# Altium PCB iForce-FPC-V0.1.PcbDoc (part 1 of 2)
Units mil, origin at the board's own origin, x right, y up, seen from the top; angles counter-clockwise.
Board outline 803.81 x 551.18 mil, 2 copper layers (Top Layer, Bottom Layer); 1 components, 2 nets, 4 pads, 4 vias.
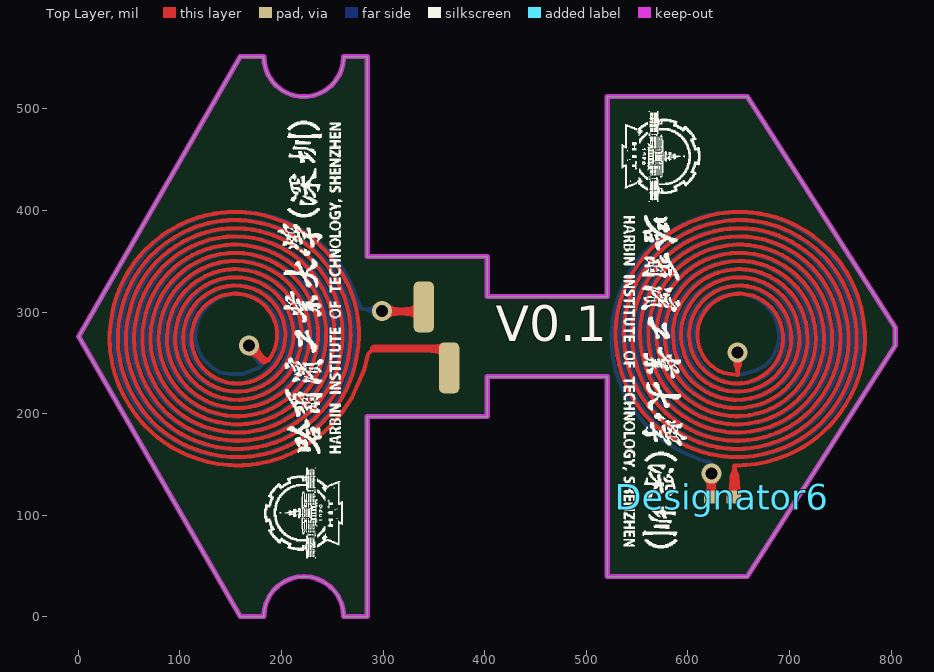
[diagram p0: Top Layer view]
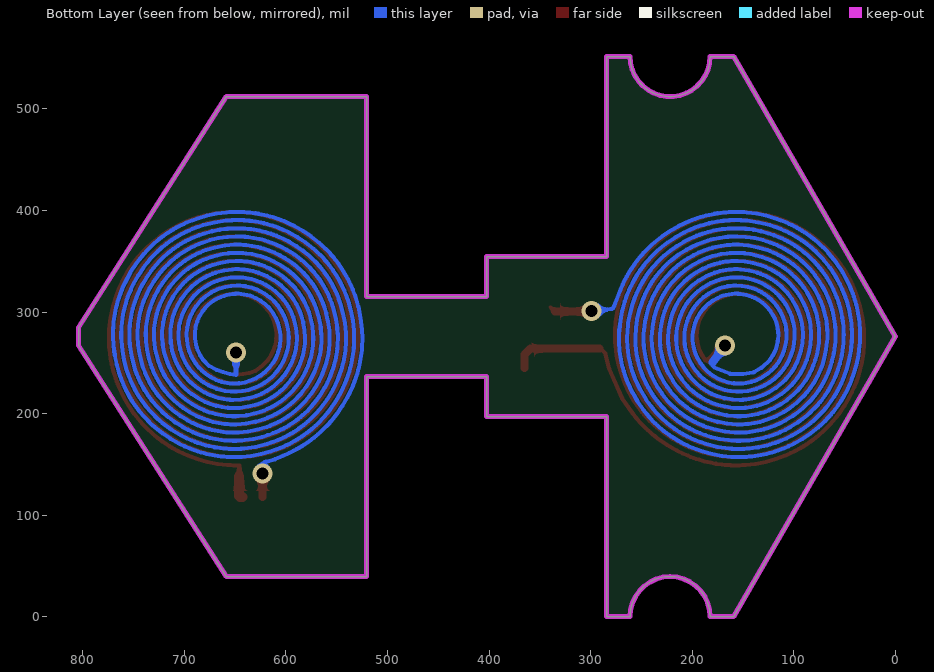
[diagram p1: Bottom Layer view, seen from below]

## Layer stack, top to bottom
Top Solder: solder mask 0.4, Solder Resist, Dk 3.5
Top Layer: signal copper 1.4
Dielectric 1: dielectric 12.6, FR-4, Dk 4.8
Bottom Layer: signal copper 1.4
Bottom Solder: solder mask 0.4, Solder Resist, Dk 3.5

## Board outline
159.36,0.25 182.5,0.25 cw(c221.87,0.25) 261.24,0.25 284.38,0.25 284.38,197.1 402.49,197.1 402.49,236.47 520.6,236.47 520.6,39.62 658.55,39.62 804.06,266.99 804.06,284.69 658.55,512.06 520.6,512.06 520.6,315.21 402.49,315.21 402.49,354.58 284.38,354.58 284.38,551.43 261.24,551.43 cw(c221.87,551.43) 182.5,551.43 159.36,551.43 0.25,275.84

## Design rules (kind name [scope] priority, off if disabled: settings)
Clearance [All] p1: gap=4 ignorepadtopadclearanceinfootprint=FALSE
PolygonConnect [All] p1: connectstyle=Relief reliefconductorwidth=10 reliefentries=4 polygonreliefangle="90 Angle" airgapwidth=10
RoutingVias [All] p1: holewidth=11.81 width=19.68 viastyle="Through Hole" minholewidth=11.81 minwidth=19.68 maxholewidth=11.81 maxwidth=19.68
SolderMaskExpansion [All] p1: expansion=4 istentingtop=FALSE
Width [All] p1: maxlimit=10 minlimit=3 preferedwidth=3
30 further rules are at their usual default settings.

## Components (designator, comment, footprint, x,y, rotation, side; value= is the part's Value field where it differs from the comment)
Designator6 "Comment" CAPC0603X33X15LL03T05 634,118 r0 top

## Footprints (in the part's own frame and the unit in brackets; to place one, negate y for a bottom-side part, rotate by r counter-clockwise, add the part's x,y. Pads: shape width x height; smd on the part's side, far side on the other; paste and mask are expansions set on the pad)
CAPC0603X33X15LL03T05 [mm] "Chip Capacitor, 2-Leads, Body 0.60x0.30mm, IPC High Density"
  rect 0.36x0.32 smd: 1(-0.28,0) 2(0.28,0)
  body extent -0.32,-0.17 0.32,0.17, height 0.33

## Free pads (board coordinates)
  rrect50% 20x50 smd: 1(340,305) 1(365,245)

## Via types
v1: diameter 19.68, hole 11.81, Top Layer to Bottom Layer, tented both sides, 4 vias

## Nets (pads, with @x,y where several pads share a name; then routed paths per layer and width w, separated by ;. In a path a pad name is that pad's centre, name@x,y a point inside that pad or via, vN(x,y) a via of type N, cw(c..) or ccw(c..) an arc to the next point about the centre after c; other vN are vias at no path point)
L1: Designator6.1 Designator6.2 | length 11479.9
  Top Layer w4: 617.73,252.54 cw(c648.33,276.38) 612.13,262.45 cw(c651.15,277.59) 610.41,267.99 cw(c651.11,277.6) 609.47,273.73 cw(c649.51,277.46) 609.35,279.54 cw(c648.2,277.46) 611.67,290.84 cw(c650.3,276.77) 614.02,296.12 cw(c650.75,276.54) 620.8,305.45 cw(c649.71,277.53) 625.1,309.3 cw(c649.85,277.29) 629.9,312.49 cw(c650.69,275.81) 635.11,314.99 cw(c651.05,274.93) 640.61,316.76 cw(c651.05,274.96) 646.3,317.78 cw(c650.95,275.98) 652.07,318.02 cw(c650.99,277.61) 657.81,317.46 cw(c650.76,276.37) 663.41,316.09 cw(c650.27,274.83) 668.79,313.98 cw(c650.1,274.38) 682.62,303.7 cw(c651.24,275.59) 689.06,294.15 cw(c649.13,274.48) 691.27,288.82 cw(c648.57,274.27) 693.56,277.5 cw(c649.97,274.38) 693.6,271.73 cw(c650.55,274.41) 691.36,260.44 cw(c648.26,275.12) 689.15,255.1 cw(c647.68,275.39) 682.82,245.45 cw(c648.7,274.53) 678.8,241.3 cw(c649.34,273.9) 669.32,234.77 cw(c648.17,276.04) 664.03,232.46 cw(c647.93,276.59) 647.01,229.63 cw(c647.94,274.1) 641.26,230.12 cw(c648.1,274.91) 635.62,231.35 cw(c648.57,276.57) 630.18,233.28 cw(c648.98,277.55) 625,235.86 cw(c648.91,277.47) 615.76,242.77 cw(c647.62,276.1) 611.84,247.01 cw(c647.19,275.71) 608.5,251.71 cw(c648.78,276.7) 605.76,256.79 cw(c650.02,277.28) 603.65,262.17 cw(c650.48,277.44) 601.38,273.49 cw(c649.13,277.32) 601.27,279.27 cw(c647.47,277.39) 601.86,285 cw(c648.65,277.17) 603.16,290.62 cw(c650.26,276.7) 605.12,296.06 cw(c651.22,276.29) 607.7,301.23 cw(c651.17,276.35) 614.55,310.52 cw(c649.85,277.56) 618.74,314.5 cw(c649.12,278.39) 623.37,317.94 cw(c650.13,276.85) 628.38,320.8 cw(c650.8,275.5) 633.7,323.06 cw(c651.04,274.92) 650.7,326.09 cw(c650.97,277.22) 656.46,325.78 cw(c650.98,277.6) 662.14,324.79 cw(c650.55,275.77) 667.68,323.14 cw(c650.08,274.46) 672.99,320.87 cw(c649.95,274.11) 687.01,310.78 cw(c651.66,275.87) 690.82,306.44 cw(c651.69,275.95) 694.09,301.69 cw(c650.11,274.99) 696.81,296.6 cw(c648.87,274.41) 698.95,291.23 cw(c648.55,274.27) 701.72,274.18 cw(c650.98,274.31) 701.38,268.42 cw(c651.29,274.31) 700.38,262.74 cw(c649.46,274.74) 698.75,257.2 cw(c648.11,275.22) 696.52,251.87 cw(c647.62,275.43) 686.63,237.69 cw(c649.25,273.91) 682.39,233.77 cw(c649.9,273.16) 677.74,230.36 cw(c648.88,274.73) 672.74,227.48 cw(c648.17,276.11) 667.45,225.15 cw(c647.84,276.98) 650.53,221.63 cw(c647.96,275.14) 644.76,221.67 cw(c647.92,274) 633.4,223.62 cw(c648.58,276.48) 627.94,225.5 cw(c649.01,277.57) 622.7,227.94 cw(c649.17,277.87) 613.1,234.37 cw(c648.36,276.89) 608.85,238.29 cw(c647.18,275.74) 605.05,242.62 cw(c646.98,275.54) 601.74,247.35 cw(c648.58,276.54) 598.94,252.4 cw(c649.9,277.19) 596.68,257.72 cw(c650.66,277.48) 593.25,274.66 cw(c648.78,277.36) 593.27,280.44 cw(c647.05,277.46) 593.89,286.17 cw(c648.21,277.24) 595.13,291.81 cw(c649.91,276.78) 596.94,297.29 cw(c651.09,276.33) 599.29,302.57 cw(c651.38,276.21) 609.3,316.68 cw(c649.72,277.75) 613.51,320.62 cw(c649.32,278.14) 623.04,327.09 cw(c650.59,275.88) 628.26,329.58 cw(c651.03,274.84) 633.7,331.53 cw(c651.07,274.82) 650.79,334.13 cw(c651.01,277.27) 656.56,333.86 cw(c651.1,278.34) 662.26,333 cw(c650.72,276.5) 667.85,331.57 cw(c650.24,274.95) 673.28,329.58 cw(c649.82,273.95) 678.49,327.08 cw(c649.7,273.7) 688.1,320.65 cw(c650.47,274.66) 692.38,316.78 cw(c651.59,275.77) 696.27,312.51 cw(c652.44,276.5) 699.7,307.88 cw(c650.89,275.46) 702.65,302.92 cw(c649.44,274.69) 705.11,297.69 cw(c648.41,274.26) 707.06,292.25 cw(c648.35,274.21) 709.76,275.16 cw(c650.7,274.29) 709.57,269.39 cw(c651.42,274.28) 707.47,258.06 cw(c648.88,274.97) 705.61,252.59 cw(c647.74,275.41) 703.24,247.32 cw(c647.39,275.56) 693.37,233.11 cw(c648.94,274.19) 689.26,229.06 cw(c650.13,272.85) 684.77,225.43 cw(c649.59,273.62) 679.95,222.26 cw(c648.66,275.19) 674.85,219.56 cw(c648.06,276.46) 669.51,217.34 cw(c647.84,276.98) 646.82,213.53 cw(c647.88,273.98) 641.06,213.91 cw(c647.83,273.31) 635.37,214.84 cw(c648.23,275.19) 629.79,216.3 cw(c648.71,276.73) 624.36,218.28 cw(c649.13,277.76) 619.12,220.74 cw(c649.18,277.91) 605.02,230.77 cw(c647.72,276.29) 601,234.91 cw(c646.38,275.1) 597.39,239.41 cw(c647.18,275.66) 594.21,244.23 cw(c648.75,276.6) 591.49,249.32 cw(c650.04,277.22) 589.24,254.64 cw(c650.74,277.5) 585.13,277.29 cw(c647.97,277.41) 585.39,283.06 cw(c647.33,277.42) 587.49,294.39 cw(c649.91,276.74) 589.31,299.87 cw(c651.12,276.28) 591.6,305.18 cw(c651.73,276) 601.12,319.64 cw(c650.45,277.07) 605.08,323.85 cw(c649.29,278.27) 609.4,327.67 cw(c648.65,279.04) 614.05,331.08 cw(c649.7,277.45) 619,334.06 cw(c650.51,275.97) 624.19,336.59 cw(c651,274.85) 629.59,338.66 cw(c651.18,274.34) 646.57,342.03 cw(c651.03,276.1) 652.34,342.17 cw(c651.07,277.79) 658.1,341.8 cw(c651.15,278.69) 663.8,340.91 cw(c650.77,276.81) 669.4,339.51 cw(c650.29,275.2) 674.86,337.62 cw(c649.84,274.05) 680.15,335.28 cw(c649.59,273.53) 694.58,325.71 cw(c650.68,274.83) 698.79,321.76 cw(c651.87,275.98) 702.63,317.45 cw(c652.1,276.24) 709.1,307.91 cw(c649.78,274.9) 711.69,302.75 cw(c648.59,274.36) 713.84,297.38 cw(c648.1,274.16) 717.82,274.69 cw(c650.88,274.25) 717.61,268.92 cw(c652.03,274.19) 715.68,257.56 cw(c649.44,274.82) 713.99,252.04 cw(c648.09,275.3) 711.84,246.67 cw(c647.18,275.7) 699.12,227.46 cw(c648.92,274.15) 695.01,223.41 cw(c650.13,272.82) 690.57,219.71 cw(c650.1,272.91) 685.84,216.42 cw(c649.07,274.52) 680.83,213.54 cw(c648.33,275.95) 675.6,211.09 cw(c647.88,277.01) 670.19,209.06 cw(c647.72,277.47) 653.2,205.68 cw(c647.87,275.77) 647.43,205.48 cw(c647.86,274.15) 641.66,205.75 cw(c647.82,273.3) 630.31,207.77 cw(c648.48,275.93) 624.8,209.49 cw(c648.95,277.27) 619.44,211.64 cw(c649.37,278.2) 600.17,224.3 cw(c647.9,276.52) 596.07,228.36 cw(c646.61,275.33) 592.33,232.75 cw(c646.17,274.95) 588.96,237.44 cw(c647.79,276.01) 586,242.39 cw(c649.27,276.82) 583.44,247.57 cw(c650.44,277.34) 581.3,252.94 cw(c651.01,277.56) 577.11,275.6 cw(c648.45,277.43) 577.2,281.38 cw(c646.63,277.54) 577.75,287.12 cw(c646.85,277.48) 578.78,292.8 cw(c648.72,277.06) 580.28,298.37 cw(c650.27,276.58) 582.21,303.82 cw(c651.38,276.14) 584.57,309.1 cw(c651.75,275.99) 597.82,327.96 cw(c649.76,277.81) 601.99,331.95 cw(c648.54,279.19) 606.47,335.58 cw(c648.82,278.77) 611.23,338.84 cw(c649.83,277.16) 616.24,341.71 cw(c650.58,275.74) 621.46,344.17 cw(c651.04,274.65) 626.87,346.23 cw(c651.19,274.29) 649.57,350.22 cw(c651.07,276.97) 655.35,350.11 cw(c651.18,278.79) 661.09,349.54 cw(c651.12,278.55) 666.76,348.51 cw(c650.7,276.68) 672.34,347.03 cw(c650.22,275.11) 677.8,345.12 cw(c649.77,273.96) 683.09,342.8 cw(c649.54,273.44) 702.11,329.76 cw(c651.19,275.3) 706.17,325.66 cw(c652.51,276.5) 709.9,321.25 cw(c652.92,276.85) 713.26,316.56 cw(c651.29,275.78) 716.24,311.62 cw(c649.79,274.95) 718.84,306.46 cw(c648.58,274.39) 721.04,301.12 cw(c647.7,274.06) 725.74,278.54 cw(c649.82,274.23) 725.85,272.77 cw(c651.5,274.19) 725.52,267 cw(c652.29,274.15) 723.5,255.65 cw(c649.63,274.8) 721.84,250.12 cw(c648.22,275.28) 719.77,244.73 cw(c647.25,275.69) 717.31,239.49 cw(c646.88,275.88) 707.72,225.06 cw(c648.11,274.88) 703.85,220.77 cw(c649.2,273.81) 699.68,216.78 cw(c650.42,272.43) 695.21,213.13 cw(c650.32,272.6) 690.48,209.83 cw(c649.28,274.23) 685.5,206.91 cw(c648.49,275.69) 680.31,204.36 cw(c647.97,276.87) 674.95,202.2 cw(c647.67,277.66) 652.36,197.56 cw(c647.84,275.53) 646.58,197.44 cw(c647.81,273.86) 640.82,197.75 cw(c647.74,272.78) 629.45,199.68 cw(c648.37,275.44) 623.91,201.29 cw(c648.85,276.9) 618.49,203.29 cw(c649.28,277.95) 613.23,205.69 cw(c649.44,278.33) 594.26,218.81 cw(c647.79,276.46) 590.17,222.89 cw(c646.5,275.27) 586.4,227.26 cw(c646.37,275.1) 579.91,236.79 cw(c648.73,276.51) 577.21,241.89 cw(c650.05,277.14) 574.88,247.18 cw(c651.29,277.63) 571.36,258.2 cw(c651.28,277.65) 569.42,269.6 cw(c649.95,277.51) 569.07,275.37 cw(c648.48,277.47) 569.12,281.14 cw(c646.69,277.55) 569.6,286.89 cw(c645.94,277.63) 570.51,292.59 cw(c647.85,277.25) 571.84,298.2 cw(c649.55,276.78) 573.58,303.71 cw(c650.9,276.31) 575.7,309.09 cw(c652.07,275.78) 581.04,319.34 cw(c652.03,275.83) 587.76,328.76 cw(c650.98,276.69) 591.59,333.09 cw(c649.92,277.7) 595.71,337.13 cw(c648.71,279.02) 600.11,340.86 cw(c648.18,279.67) 604.78,344.25 cw(c649.27,278.05) 609.68,347.3 cw(c650.15,276.52) 614.79,349.98 cw(c650.78,275.21) 620.09,352.31 cw(c651.26,273.97) 631.1,355.84 cw(c651.29,273.93) 642.49,357.83 cw(c651.15,275.21) 648.26,358.23 cw(c651.1,276.63) 654.03,358.23 cw(c651.17,278.38) 659.79,357.81 cw(c651.17,278.83) 671.13,355.73 cw(c650.51,276.13) 676.67,354.09 cw(c650.03,274.69) 682.08,352.06 cw(c649.6,273.66) 687.34,349.67 cw(c649.39,273.2) 706.44,336.71 cw(c650.89,274.94) 710.59,332.7 cw(c652.09,276.1) 714.46,328.42 cw(c653.17,277.02) 721.21,319.07 cw(c650.9,275.58) 724.07,314.06 cw(c649.46,274.83) 726.59,308.85 cw(c648.31,274.31) 728.74,303.49 cw(c647.66,274.06) 733.91,275.16 cw(c650.8,274.19) 733.78,269.39 cw(c652.62,274.08) 733.24,263.65 cw(c653.04,274.05) 732.29,257.96 cw(c651.11,274.44) 730.95,252.34 cw(c649.42,274.91) 729.22,246.83 cw(c648.06,275.38) 727.12,241.45 cw(c646.82,275.92) 721.86,231.15 cw(c646.7,275.98) 715.3,221.63 cw(c647.62,275.25) 711.56,217.22 cw(c648.62,274.35) 707.53,213.08 cw(c649.79,273.13) 703.23,209.22 cw(c650.71,272.05) 693.89,202.47 cw(c649.27,274.32) 688.88,199.59 cw(c648.5,275.77) 683.69,197.06 cw(c647.97,276.95) 678.34,194.87 cw(c647.65,277.77) 650.06,189.41 cw(c647.81,274.87) 644.29,189.45 cw(c647.73,273.1) 638.53,189.89 cw(c647.72,272.64) 627.19,191.95 cw(c648.38,275.35) 621.64,193.56 cw(c648.86,276.83) 616.21,195.53 cw(c649.3,277.94) 610.92,197.86 cw(c649.65,278.67) 591.56,210.44 cw(c648.45,277.21) 587.29,214.33 cw(c647.38,276.11) 583.29,218.49 cw(c646.03,274.9) 579.58,222.91 cw(c645.37,274.36) 576.18,227.57 cw(c646.99,275.46) 573.11,232.46 cw(c648.54,276.36) 570.38,237.54 cw(c649.9,277.04) 567.98,242.8 cw(c650.95,277.48) 565.92,248.21 cw(c651.61,277.71) 561.24,270.81 cw(c649.64,277.53) 560.99,276.58 cw(c648.09,277.51) 561.12,282.36 cw(c646.27,277.61) 561.64,288.1 cw(c645.51,277.69) 562.55,293.8 cw(c647.43,277.32) 563.83,299.43 cw(c649.17,276.86) 565.49,304.96 cw(c650.61,276.38) 567.51,310.37 cw(c651.67,275.95) 569.87,315.65 cw(c652.34,275.62) 582.48,334.99 cw(c650.87,276.83) 586.36,339.27 cw(c649.78,277.89) 590.51,343.28 cw(c648.57,279.22) 594.91,347.01 cw(c648.4,279.38) 604.42,353.55 cw(c649.86,276.98) 609.48,356.33 cw(c650.57,275.59) 614.71,358.79 cw(c651.05,274.48) 620.09,360.91 cw(c651.31,273.8) 648.39,366.29 cw(c651.14,276.7) 654.17,366.28 cw(c651.2,278.44) 659.93,365.89 cw(c651.28,279.54) 671.3,363.98 cw(c650.68,276.84) 676.87,362.47 cw(c650.2,275.27) 682.34,360.61 cw(c649.73,274.04) 687.68,358.4 cw(c649.24,272.96) 697.92,353.02 cw(c649.25,272.95) 707.41,346.41 cw(c649.98,273.88) 711.83,342.68 cw(c650.87,274.86) 716,338.69 cw(c652.04,276.01) 719.91,334.43 cw(c653.47,277.24) 723.53,329.94 cw(c653.32,277.15) 726.84,325.22 cw(c651.69,276.08) 729.84,320.29 cw(c650.16,275.22) 732.53,315.17 cw(c648.84,274.58) 734.89,309.9 cw(c647.48,274.03) 738.61,298.95 cw(c647.3,273.95) 741.64,281.88 cw(c649.06,274.13) 741.94,276.11 cw(c650.56,274.16) 741.88,270.34 cw(c652.33,274.08) 741.46,264.58 cw(c653.15,274.02) 739.49,253.22 cw(c650.42,274.65) 737.96,247.65 cw(c648.86,275.13) 736.09,242.18 cw(c647.63,275.59) 733.88,236.84 cw(c646.54,276.09) 728.51,226.6 cw(c646.76,275.92) 718.25,212.63 cw(c648.34,274.56) 714.29,208.43 cw(c649.47,273.42) 710.07,204.48 cw(c650.7,272.03) 705.62,200.81 cw(c651.06,271.6) 700.94,197.44 cw(c649.96,273.23) 696.05,194.37 cw(c649.04,274.79) 690.98,191.61 cw(c648.35,276.17) 685.74,189.17 cw(c647.87,277.27) 680.36,187.05 cw(c647.58,278.05) 652.09,181.43 cw(c647.77,275.39) 646.32,181.34 cw(c647.74,273.72) 640.55,181.61 cw(c647.59,271.83) 634.81,182.24 cw(c647.65,272.05) 629.13,183.24 cw(c648.04,273.97) 623.52,184.59 cw(c648.51,275.67) 618,186.29 cw(c648.99,277.08) 612.59,188.32 cw(c649.58,278.5) 602.17,193.34 cw(c649.76,278.86) 587.83,203.08 cw(c648.79,277.64) 583.46,206.87 cw(c647.84,276.62) 579.34,210.91 cw(c646.62,275.45) 575.47,215.2 cw(c645.17,274.22) 571.89,219.72 cw(c645.56,274.49) 568.59,224.45 cw(c647.2,275.55) 565.6,229.39 cw(c648.72,276.42) 562.91,234.5 cw(c650.05,277.07) 560.53,239.76 cw(c651.46,277.64) 556.71,250.68 cw(c651.84,277.78) 553.44,267.71 cw(c650.31,277.6) 553.03,273.47 cw(c648.93,277.54) 552.96,279.25 cw(c647.25,277.58) 553.23,285.02 cw(c645.36,277.73) 553.87,290.75 cw(c645.56,277.68) 554.86,296.43 cw(c647.47,277.28) 556.2,302.05 cw(c649.19,276.82) 557.88,307.57 cw(c650.62,276.34) 559.89,312.99 cw(c652.09,275.73) 564.84,323.45 cw(c652.35,275.63) 578.18,342.29 cw(c650.49,277.24) 582.17,346.47 cw(c649.35,278.4) 586.4,350.4 cw(c648.12,279.8) 590.86,354.06 cw(c647.73,280.28) 595.53,357.44 cw(c648.83,278.65) 600.41,360.53 cw(c649.76,277.08) 605.46,363.32 cw(c650.49,275.67) 610.68,365.81 cw(c651,274.52) 616.03,367.99 cw(c651.34,273.66) 649.98,374.37 cw(c651.18,277.19) 655.75,374.27 cw(c651.26,278.98) 661.51,373.82 cw(c651.33,279.88) 672.87,371.88 cw(c650.72,277.14) 678.45,370.4 cw(c650.25,275.53) 683.94,368.6 cw(c649.77,274.22) 689.32,366.47 cw(c649.22,272.95) 699.67,361.32 cw(c649.13,272.76) 713.95,351.48 cw(c650.16,274.03) 718.3,347.67 cw(c651.11,275.06) 722.42,343.63 cw(c652.33,276.23) 726.3,339.35 cw(c653.77,277.46) 729.91,334.85 cw(c653.72,277.45) 733.24,330.14 cw(c652.08,276.36) 736.28,325.24 cw(c650.53,275.46) 739.04,320.16 cw(c649.15,274.76) 741.49,314.93 cw(c648.02,274.27) 743.65,309.56 cw(c647.23,273.95) 750,275.61 cw(c650.74,274.12) 749.92,269.83 cw(c652.52,274.04) 749.5,264.08 cw(c653.75,273.93) 747.63,252.69 cw(c651.04,274.52) 746.2,247.1 cw(c649.4,274.99) 744.44,241.6 cw(c648.03,275.47) 742.37,236.2 cw(c646.66,276.05) 737.34,225.79 cw(c646.48,276.11) 723.97,206.96 cw(c648.33,274.52) 720,202.76 cw(c649.47,273.38) 715.8,198.8 cw(c650.68,272.01) 711.38,195.09 cw(c650.96,271.72) 701.91,188.5 cw(c649.45,274.12) 696.91,185.63 cw(c648.67,275.59) 691.74,183.04 cw(c648.08,276.84) 686.43,180.75 cw(c647.58,278.13) 675.47,177.06 cw(c647.49,278.38) 658.43,173.84 cw(c647.67,276.85) 652.67,173.4 cw(c647.73,275.5) 646.89,173.28 cw(c647.72,273.86) 641.12,173.5 cw(c647.59,272.01) 635.38,174.04 cw(c647.63,272) 624.04,176.14 cw(c648.28,274.77) 618.47,177.68 cw(c648.76,276.34) 613,179.53 cw(c649.23,277.61) 607.63,181.68 cw(c649.78,278.84) 597.29,186.86 cw(c649.87,279.05) 582.98,196.65 cw(c648.9,277.83) 578.59,200.42 cw(c648,276.83) 574.43,204.42 cw(c646.83,275.68) 570.49,208.65 cw(c645.43,274.46) 566.81,213.09 cw(c645.37,274.36) 560.26,222.58 cw(c647.78,275.86) 557.4,227.6 cw(c649.24,276.64) 554.82,232.76 cw(c650.49,277.22) 552.53,238.07 cw(c651.79,277.73) 548.82,249.03 cw(c652.09,277.84) 545.53,266.06 cw(c650.63,277.66) 545.05,271.82 cw(c649.33,277.59) 544.89,277.59 cw(c647.73,277.59) 545.05,283.36 cw(c645.9,277.69) 545.54,289.11 cw(c645.18,277.75) 547.51,300.48 cw(c647.95,277.13) 548.97,306.06 cw(c649.59,276.65) 550.74,311.56 cw(c650.94,276.18) 552.82,316.96 cw(c652.33,275.59) 557.82,327.38 cw(c652.62,275.47) 571.02,346.34 cw(c650.89,276.91) 574.93,350.6 cw(c649.8,277.97) 579.06,354.63 cw(c648.6,279.28) 583.41,358.42 cw(c647.39,280.75) 587.97,361.96 cw(c647.94,279.97) 592.72,365.24 cw(c648.99,278.34) 597.65,368.24 cw(c649.87,276.8) 602.74,370.96 cw(c650.56,275.44) 607.98,373.41 cw(c651.22,273.88) 618.81,377.44 cw(c651.47,273.17) 641.47,381.98 cw(c651.26,275.05) 647.24,382.35 cw(c651.21,276.45) 653.01,382.41 cw(c651.24,278.13) 658.78,382.15 cw(c651.38,280.01) 664.52,381.57 cw(c651.46,280.75) 670.22,380.67 cw(c651.1,278.81) 675.86,379.45 cw(c650.65,277.01) 681.43,377.92 cw(c650.17,275.43) 686.9,376.08 cw(c649.7,274.13) 692.28,373.96 cw(c649.14,272.83) 702.67,368.86 cw(c649.09,272.68) 721.56,355.57 cw(c650.58,274.45) 725.8,351.65 cw(c651.66,275.55) 729.83,347.51 cw(c652.96,276.75) 733.62,343.15 cw(c654.44,277.97) 737.16,338.6 cw(c653.71,277.45) 740.44,333.85 cw(c652.08,276.39) 743.45,328.93 cw(c650.53,275.5) 746.19,323.85 cw(c649.15,274.8) 748.66,318.62 cw(c647.56,274.11) 752.76,307.81 cw(c646.93,273.87) 757.93,279.43 cw(c649.73,274.08) 758.06,273.65 cw(c651.35,274.07) 757.88,267.88 cw(c653.18,273.96) 757.39,262.13 cw(c654.01,273.9) 755.45,250.76 cw(c651.23,274.5) 754.02,245.17 cw(c649.57,274.97) 752.29,239.66 cw(c648.17,275.45) 750.26,234.24 cw(c646.68,276.07) 745.39,223.76 cw(c646.09,276.35) 732.53,204.56 cw(c647.57,275.16) 728.72,200.21 cw(c648.6,274.21) 724.69,196.08 cw(c649.76,273.02) 720.44,192.16 cw(c650.98,271.62) 716,188.48 cw(c651.19,271.41) 706.53,181.89 cw(c649.66,273.84) 701.55,178.98 cw(c648.84,275.32) 696.41,176.35 cw(c648.22,276.63) 691.13,173.98 cw(c647.62,278.07) 680.25,170.07 cw(c647.44,278.6) 657.56,165.67 cw(c647.65,276.65) 651.8,165.31 cw(c647.7,275.24) 646.02,165.24 cw(c647.67,273.57) 640.25,165.49 cw(c647.54,271.7) 634.51,166.04 cw(c647.55,271.46) 623.15,168.07 cw(c648.18,274.26) 617.57,169.55 cw(c648.66,275.89) 612.07,171.31 cw(c649.13,277.26) 606.67,173.36 cw(c649.74,278.71) 596.2,178.27 cw(c650.01,279.27) 577.01,191.14 cw(c648.82,277.79) 572.65,194.94 cw(c647.88,276.77) 568.5,198.96 cw(c646.71,275.62) 564.57,203.19 cw(c645.32,274.39) 560.87,207.62 cw(c644.8,273.95) 554.22,217.04 cw(c647.2,275.49) 551.28,222.01 cw(c648.71,276.33) 548.59,227.13 cw(c650.05,276.99) 546.18,232.38 cw(c651.58,277.63) 542.16,243.22 cw(c652.12,277.84) 537,271.61 cw(c649.35,277.63) 536.84,277.38 cw(c647.76,277.62) 536.98,283.16 cw(c645.95,277.71) 537.42,288.91 cw(c644.43,277.86) 539.22,300.3 cw(c647.1,277.31) 540.57,305.92 cw(c648.82,276.85) 542.21,311.45 cw(c650.31,276.37) 544.13,316.9 cw(c651.99,275.72) 548.79,327.48 cw(c652.89,275.29) 564.82,351.48 cw(c651.03,276.84) 568.72,355.75 cw(c649.95,277.87) 572.82,359.82 cw(c648.76,279.14) 577.12,363.66 cw(c647.53,280.59) 581.62,367.27 cw(c647.29,280.88) 586.31,370.64 cw(c648.4,279.24) 591.16,373.76 cw(c649.36,277.65) 596.18,376.62 cw(c650.15,276.18) 601.33,379.23 cw(c650.76,274.91) 606.62,381.57 cw(c651.34,273.49) 617.51,385.46 cw(c651.53,272.94) 640.18,389.94 cw(c651.32,274.79) 645.95,390.35 cw(c651.25,276.15) 651.72,390.47 cw(c651.26,277.77) 657.5,390.3 cw(c651.36,279.59) 663.25,389.83 cw(c651.49,280.9) 674.63,387.99 cw(c650.93,278.18) 680.24,386.63 cw(c650.46,276.46) 685.78,384.98 cw(c649.98,274.98) 691.23,383.06 cw(c649.33,273.3) 701.81,378.41 cw(c648.87,272.34) 725.87,362.47 cw(c650.34,274.13) 730.17,358.61 cw(c651.34,275.19) 734.27,354.54 cw(c652.57,276.36) 738.15,350.26 cw(c653.99,277.59) 741.81,345.8 cw(c654.1,277.72) 748.4,336.33 cw(c651.67,276.18) 751.32,331.35 cw(c650.17,275.35) 753.99,326.23 cw(c648.84,274.69) 756.41,320.98 cw(c647.3,274.04) 760.46,310.15 cw(c646.62,273.8) 765.85,281.8 cw(c649.17,274.02) 766.09,276.02 cw(c650.69,274.05) 766.05,270.25 cw(c652.43,273.99) 765.71,264.49 cw(c654.34,273.83) 765.08,258.75 cw(c654.75,273.79) 764.15,253.06 cw(c652.8,274.16) 762.94,247.42 cw(c650.98,274.6) 761.43,241.84 cw(c649.37,275.08) 759.65,236.35 cw(c648.01,275.55) 757.61,230.94 cw(c646.53,276.16) 752.73,220.45 cw(c646.02,276.39) 736.37,196.68 cw(c648.06,274.68) 732.44,192.44 cw(c649.16,273.6) 728.31,188.41 cw(c650.36,272.31) 723.98,184.59 cw(c651.59,270.84) 719.47,180.99 cw(c651.72,270.7) 714.78,177.64 cw(c650.6,272.35) 709.92,174.52 cw(c649.64,273.94) 704.91,171.65 cw(c648.84,275.41) 699.76,169.03 cw(c648.22,276.7) 694.49,166.66 cw(c647.61,278.17) 683.62,162.69 cw(c647.41,278.71) 655.25,157.43 cw(c647.64,276.08) 649.47,157.2 cw(c647.66,274.56) 643.7,157.25 cw(c647.6,272.81) 637.94,157.59 cw(c647.44,270.91) 632.2,158.22 cw(c647.39,270.41) 626.5,159.14 cw(c647.76,272.36) 620.86,160.34 cw(c648.19,274.18) 615.28,161.83 cw(c648.67,275.81) 609.78,163.59 cw(c649.15,277.2) 604.37,165.61 cw(c649.77,278.72) 593.85,170.42 cw(c650.09,279.4) 569.94,186.58 cw(c648.52,277.5) 565.66,190.47 cw(c647.49,276.42) 561.57,194.55 cw(c646.26,275.25) 557.69,198.83 cw(c644.83,274.02) 554.03,203.29 cw(c644.58,273.78) 547.41,212.74 cw(c647.01,275.34) 544.46,217.7 cw(c648.53,276.19) 541.76,222.8 cw(c649.9,276.88) 539.3,228.03 cw(c651.51,277.58) 535.13,238.82 cw(c652.54,277.94) 529.26,267.08 cw(c650.39,277.71) 528.89,272.85 cw(c648.99,277.65) 528.8,278.62 cw(c647.35,277.67) 528.98,284.4 cw(c645.53,277.77) 529.45,290.15 cw(c644,277.93) 531.25,301.54 cw(c646.68,277.39) 532.57,307.16 cw(c648.44,276.93) 534.16,312.71 cw(c649.98,276.45) 536.02,318.18 cw(c651.79,275.77) 540.5,328.84 cw(c653.07,275.18) 559.58,357.71 cw(c650.9,277) 563.51,361.95 cw(c649.8,278.07) 567.63,365.99 cw(c648.61,279.34) 571.95,369.83 cw(c647.38,280.8) 576.44,373.45 cw(c646.93,281.37) 581.11,376.84 cw(c648.05,279.74) 585.94,380 cw(c649.05,278.13) 590.91,382.92 cw(c649.88,276.63) 596.03,385.6 cw(c650.55,275.28) 601.27,388.04 cw(c651.23,273.69) 612.07,392.17 cw(c651.58,272.69) 640.34,398.03 cw(c651.35,274.84) 646.11,398.41 cw(c651.29,276.22) 651.88,398.52 cw(c651.3,277.84) 657.65,398.36 cw(c651.4,279.66) 663.41,397.91 cw(c651.59,281.59) 669.13,397.19 cw(c651.47,280.87) 674.81,396.18 cw(c651.08,278.94) 680.44,394.9 cw(c650.63,277.17) 686,393.35 cw(c650.15,275.59) 691.49,391.54 cw(c649.68,274.26) 696.89,389.47 cw(c649.07,272.8) 707.37,384.6 cw(c648.78,272.19) 731.29,368.43 cw(c650.32,274.06) 735.59,364.56 cw(c651.31,275.11) 739.7,360.5 cw(c652.52,276.27) 743.61,356.26 cw(c653.91,277.49) 747.31,351.83 cw(c654.79,278.22) 754.05,342.46 cw(c652.43,276.66) 757.07,337.54 cw(c650.87,275.76) 759.85,332.48 cw(c649.45,275.02) 762.4,327.3 cw(c647.71,274.22) 766.77,316.59 cw(c646.37,273.73) 773.86,282.71 cw(c649.11,273.99) 774.13,276.94 cw(c650.62,274.02) 774.13,271.17 cw(c652.35,273.98) 773.86,265.4 cw(c654.25,273.85) 773.32,259.66 cw(c655.08,273.77) 771.4,248.29 cw(c652.22,274.37) 770.03,242.68 cw(c650.45,274.85) 768.4,237.14 cw(c648.88,275.35) 766.51,231.68 cw(c647.55,275.84) 764.38,226.31 cw(c646.1,276.47) 759.39,215.88 cw(c645.44,276.79) 743.02,192.1 cw(c647.25,275.29) 739.13,187.82 cw(c648.27,274.31) 735.06,183.73 cw(c649.42,273.12) 730.79,179.84 cw(c650.62,271.73) 726.36,176.15 cw(c651.28,270.93) 716.98,169.42 cw(c649.92,273) 712.07,166.4 cw(c649.15,274.32) 707.01,163.61 cw(c648.28,276) 696.54,158.73 cw(c647.61,277.6) 657.31,149.42 cw(c647.91,274.73) 651.53,149.12 cw(c647.95,273.34) 645.74,149.09 646,138 ; 618,252.32 623.32,247 629.48,242.39 ccw(c631.88,245.59) 630.61,241.8 635.7,240.1 ; 635.73,240.09 ccw(c636.97,243.89) 636.28,239.95 641.95,239.01 ccw(c642.61,242.95) 642.04,238.99 649,238 649,248
  Top Layer w8: Designator6.1@622.98,118 623,120.3 v1(623,141) ; 649,248 v1(649,260)
  Top Layer w10: Designator6.2@643.02,118 644.46,118.9 Designator6.2@645.11,119.3 ; Designator6.2@645.02,118 646,118.98 646,138
  Bottom Layer w4: 610.76,155.1 602.38,158.73 cw(c650.64,276) 591.91,163.61 cw(c649.78,274.32) 586.86,166.4 cw(c649.01,273) 581.95,169.42 cw(c647.64,270.93) 572.57,176.15 cw(c648.31,271.73) 568.13,179.84 cw(c649.51,273.12) 563.87,183.73 cw(c650.65,274.31) 559.8,187.82 cw(c651.68,275.29) 555.91,192.1 cw(c653.49,276.79) 539.54,215.88 cw(c652.83,276.47) 534.55,226.31 cw(c651.38,275.84) 532.41,231.68 cw(c650.05,275.35) 530.53,237.14 cw(c648.48,274.85) 528.9,242.68 cw(c646.71,274.37) 527.53,248.29 cw(c643.85,273.77) 525.61,259.66 cw(c644.68,273.85) 525.07,265.4 cw(c646.58,273.98) 524.8,271.17 cw(c648.31,274.02) 524.8,276.94 cw(c649.82,273.99) 525.07,282.71 cw(c652.56,273.73) 532.16,316.59 cw(c651.22,274.22) 536.53,327.3 cw(c649.48,275.02) 539.08,332.49 cw(c648.06,275.76) 541.86,337.54 cw(c646.5,276.66) 544.88,342.46 cw(c644.14,278.22) 551.62,351.83 cw(c645.02,277.49) 555.32,356.26 cw(c646.41,276.27) 559.23,360.5 cw(c647.62,275.11) 563.34,364.56 cw(c648.61,274.06) 567.64,368.43 cw(c650.15,272.19) 591.55,384.6 cw(c649.86,272.8) 602.04,389.47 cw(c649.25,274.26) 607.44,391.54 cw(c648.78,275.59) 612.93,393.35 cw(c648.3,277.17) 618.49,394.9 cw(c647.85,278.94) 624.12,396.18 cw(c647.46,280.87) 629.8,397.19 cw(c647.34,281.59) 635.52,397.91 cw(c647.53,279.66) 641.27,398.36 cw(c647.63,277.84) 647.05,398.52 cw(c647.64,276.22) 652.82,398.41 cw(c647.58,274.84) 658.59,398.03 cw(c647.35,272.69) 686.86,392.17 cw(c647.69,273.69) 697.66,388.04 cw(c648.38,275.28) 702.9,385.6 cw(c649.04,276.63) 708.01,382.92 cw(c649.88,278.13) 712.99,380 cw(c650.88,279.74) 717.82,376.84 cw(c652,281.37) 722.49,373.45 cw(c651.55,280.8) 726.98,369.83 cw(c650.32,279.34) 731.29,365.99 cw(c649.12,278.07) 735.42,361.95 cw(c648.02,277) 739.35,357.71 cw(c645.86,275.18) 758.43,328.84 cw(c647.14,275.77) 762.91,318.18 cw(c648.95,276.45) 764.77,312.71 cw(c650.49,276.93) 766.36,307.16 cw(c652.24,277.39) 767.68,301.54 cw(c654.92,277.93) 769.47,290.15 cw(c653.4,277.77) 769.94,284.4 cw(c651.58,277.67) 770.13,278.62 cw(c649.94,277.65) 770.04,272.85 cw(c648.54,277.71) 769.67,267.08 cw(c646.38,277.94) 763.8,238.82 cw(c647.42,277.58) 759.63,228.03 cw(c649.03,276.88) 757.17,222.8 cw(c650.4,276.19) 754.47,217.7 cw(c651.92,275.34) 751.51,212.74 cw(c654.35,273.78) 744.89,203.29 cw(c654.1,274.02) 741.24,198.83 cw(c652.67,275.25) 737.36,194.55 cw(c651.43,276.42) 733.27,190.47 cw(c650.41,277.5) 728.99,186.58 cw(c648.84,279.4) 705.08,170.42 cw(c649.16,278.72) 694.56,165.61 cw(c649.78,277.2) 689.15,163.59 cw(c650.26,275.81) 683.65,161.83 cw(c650.74,274.18) 678.07,160.34 cw(c651.17,272.36) 672.42,159.14 cw(c651.54,270.41) 666.73,158.22 cw(c651.49,270.91) 660.99,157.59 cw(c651.33,272.81) 655.23,157.25 cw(c651.27,274.56) 649.46,157.2 cw(c651.29,276.08) 643.68,157.43 cw(c651.52,278.71) 615.3,162.69 cw(c651.32,278.17) 604.44,166.66 cw(c650.71,276.7) 599.17,169.03 cw(c650.09,275.41) 594.02,171.65 cw(c649.29,273.94) 589.01,174.52 cw(c648.33,272.35) 584.15,177.64 cw(c647.21,270.7) 579.46,180.99 cw(c647.34,270.84) 574.95,184.59 cw(c648.57,272.31) 570.62,188.41 cw(c649.77,273.6) 566.49,192.44 cw(c650.87,274.68) 562.56,196.68 cw(c652.91,276.39) 546.19,220.45 cw(c652.4,276.16) 541.32,230.94 cw(c650.92,275.55) 539.27,236.35 cw(c649.56,275.08) 537.5,241.84 cw(c647.95,274.6) 535.99,247.42 cw(c646.13,274.16) 534.77,253.06 cw(c644.18,273.79) 533.85,258.75 cw(c644.59,273.83) 533.22,264.49 cw(c646.5,273.99) 532.88,270.25 cw(c648.24,274.05) 532.84,276.02 cw(c649.76,274.02) 533.08,281.8 cw(c652.31,273.8) 538.47,310.15 cw(c651.63,274.04) 542.52,320.98 cw(c650.09,274.69) 544.93,326.23 cw(c648.76,275.35) 547.61,331.35 cw(c647.25,276.18) 550.53,336.33 cw(c644.82,277.72) 557.12,345.8 cw(c644.94,277.59) 560.78,350.26 cw(c646.36,276.36) 564.66,354.54 cw(c647.59,275.19) 568.76,358.61 cw(c648.59,274.13) 573.05,362.47 cw(c650.06,272.34) 597.12,378.41 cw(c649.6,273.3) 607.7,383.06 cw(c648.95,274.98) 613.15,384.98 cw(c648.47,276.46) 618.69,386.63 cw(c648,278.18) 624.29,387.99 cw(c647.44,280.9) 635.68,389.83 cw(c647.57,279.59) 641.43,390.3 cw(c647.67,277.77) 647.2,390.47 cw(c647.67,276.15) 652.98,390.35 cw(c647.61,274.79) 658.75,389.94 cw(c647.4,272.94) 681.42,385.46 cw(c647.59,273.49) 692.31,381.57 cw(c648.17,274.91) 697.6,379.23 cw(c648.77,276.18) 702.75,376.62 cw(c649.56,277.65) 707.77,373.76 cw(c650.53,279.24) 712.62,370.64 cw(c651.64,280.88) 717.31,367.27 cw(c651.4,280.59) 721.8,363.66 cw(c650.17,279.14) 726.11,359.82 cw(c648.98,277.87) 730.21,355.75 cw(c647.9,276.84) 734.11,351.48 cw(c646.04,275.29) 750.14,327.48 cw(c646.94,275.72) 754.8,316.9 cw(c648.62,276.37) 756.72,311.45 cw(c650.11,276.85) 758.36,305.92 cw(c651.83,277.31) 759.71,300.3 cw(c654.5,277.86) 761.51,288.91 cw(c652.98,277.71) 761.95,283.16 cw(c651.17,277.62) 762.09,277.38 cw(c649.58,277.63) 761.92,271.61 cw(c646.81,277.84) 756.77,243.22 cw(c647.35,277.63) 752.75,232.38 cw(c648.88,276.99) 750.33,227.13 cw(c650.21,276.33) 747.65,222.01 cw(c651.73,275.49) 744.71,217.04 cw(c654.13,273.95) 738.06,207.62 cw(c653.61,274.39) 734.36,203.19 cw(c652.22,275.62) 730.43,198.96 cw(c651.04,276.77) 726.28,194.94 cw(c650.11,277.79) 721.92,191.14 cw(c648.92,279.27) 702.73,178.27 cw(c649.19,278.71) 692.26,173.36 cw(c649.79,277.26) 686.86,171.31 cw(c650.27,275.89) 681.36,169.54 cw(c650.75,274.26) 675.78,168.07 cw(c651.38,271.46) 664.42,166.04 cw(c651.39,271.7) 658.68,165.49 cw(c651.26,273.57) 652.91,165.24 cw(c651.23,275.24) 647.13,165.31 cw(c651.28,276.65) 641.36,165.67 cw(c651.49,278.6) 618.68,170.07 cw(c651.31,278.07) 607.8,173.98 cw(c650.71,276.63) 602.52,176.35 cw(c650.09,275.32) 597.38,178.98 cw(c649.27,273.84) 592.39,181.89 cw(c647.74,271.41) 582.93,188.48 cw(c647.95,271.62) 578.48,192.16 cw(c649.17,273.02) 574.24,196.08 cw(c650.33,274.21) 570.21,200.21 cw(c651.36,275.16) 566.4,204.56 cw(c652.84,276.35) 553.54,223.76 cw(c652.25,276.07) 548.66,234.24 cw(c650.75,275.45) 546.64,239.66 cw(c649.36,274.97) 544.91,245.17 cw(c647.7,274.5) 543.48,250.76 cw(c644.92,273.9) 541.54,262.13 cw(c645.75,273.96) 541.05,267.88 cw(c647.58,274.07) 540.87,273.65 cw(c649.2,274.08) 541,279.43 cw(c652,273.87) 546.17,307.81 cw(c651.37,274.11) 550.27,318.62 cw(c649.78,274.8) 552.74,323.85 cw(c648.4,275.5) 555.48,328.93 cw(c646.85,276.39) 558.49,333.85 cw(c645.22,277.45) 561.77,338.6 cw(c644.49,277.97) 565.31,343.15 cw(c645.97,276.75) 569.1,347.51 cw(c647.27,275.55) 573.13,351.65 cw(c648.35,274.45) 577.37,355.57 cw(c649.84,272.68) 596.26,368.86 cw(c649.79,272.83) 606.65,373.96 cw(c649.23,274.13) 612.02,376.08 cw(c648.76,275.43) 617.5,377.92 cw(c648.28,277.01) 623.07,379.45 cw(c647.83,278.81) 628.71,380.67 cw(c647.47,280.75) 634.41,381.57 cw(c647.55,280.01) 640.15,382.15 cw(c647.69,278.13) 645.91,382.41 cw(c647.72,276.45) 651.69,382.35 cw(c647.66,275.05) 657.46,381.98 cw(c647.46,273.17) 680.11,377.44 cw(c647.71,273.88) 690.95,373.41 cw(c648.37,275.44) 696.19,370.96 cw(c649.06,276.8) 701.28,368.24 cw(c649.93,278.34) 706.21,365.24 cw(c650.99,279.97) 710.96,361.96 cw(c651.54,280.75) 715.52,358.42 cw(c650.33,279.28) 719.87,354.63 cw(c649.13,277.97) 724,350.6 cw(c648.04,276.91) 727.91,346.34 cw(c646.31,275.47) 741.11,327.38 cw(c646.6,275.59) 746.11,316.96 cw(c647.99,276.18) 748.19,311.56 cw(c649.34,276.65) 749.96,306.06 cw(c650.97,277.13) 751.42,300.48 cw(c653.74,277.75) 753.39,289.11 cw(c653.02,277.69) 753.87,283.36 cw(c651.2,277.59) 754.04,277.59 cw(c649.6,277.59) 753.88,271.82 cw(c648.29,277.66) 753.4,266.05 cw(c646.84,277.84) 750.11,249.03 cw(c647.14,277.73) 746.4,238.07 cw(c648.44,277.22) 744.11,232.76 cw(c649.69,276.64) 741.53,227.6 cw(c651.14,275.86) 738.67,222.58 cw(c653.56,274.36) 732.11,213.09 cw(c653.49,274.46) 728.43,208.65 cw(c652.1,275.68) 724.5,204.42 cw(c650.93,276.83) 720.34,200.42 cw(c650.02,277.83) 715.95,196.65 cw(c649.06,279.05) 701.64,186.86 cw(c649.15,278.84) 691.3,181.68 cw(c649.7,277.61) 685.93,179.53 cw(c650.16,276.34) 680.46,177.68 cw(c650.64,274.77) 674.89,176.14 cw(c651.29,272) 663.55,174.04 cw(c651.34,272.01) 657.81,173.5 cw(c651.21,273.86) 652.04,173.28 cw(c651.2,275.5) 646.26,173.4 cw(c651.26,276.85) 640.5,173.84 cw(c651.44,278.38) 623.46,177.06 cw(c651.35,278.13) 612.49,180.75 cw(c650.84,276.84) 607.19,183.04 cw(c650.26,275.59) 602.02,185.63 cw(c649.48,274.12) 597.01,188.5 cw(c647.97,271.72) 587.55,195.09 cw(c648.25,272.01) 583.13,198.8 cw(c649.46,273.38) 578.93,202.76 cw(c650.6,274.52) 574.96,206.96 cw(c652.45,276.11) 561.59,225.79 cw(c652.27,276.05) 556.56,236.2 cw(c650.89,275.47) 554.49,241.6 cw(c649.53,274.99) 552.73,247.1 cw(c647.88,274.52) 551.29,252.69 cw(c645.18,273.93) 549.43,264.08 cw(c646.41,274.04) 549.01,269.83 cw(c648.19,274.12) 548.93,275.61 cw(c651.7,273.95) 555.28,309.56 cw(c650.91,274.27) 557.44,314.93 cw(c649.78,274.76) 559.89,320.16 cw(c648.4,275.46) 562.64,325.24 cw(c646.85,276.36) 565.69,330.14 cw(c645.21,277.45) 569.02,334.85 cw(c645.16,277.46) 572.63,339.35 cw(c646.6,276.23) 576.51,343.63 cw(c647.82,275.06) 580.63,347.67 cw(c648.77,274.03) 584.98,351.48 cw(c649.79,272.76) 599.26,361.32 cw(c649.71,272.95) 609.61,366.47 cw(c649.16,274.22) 614.99,368.6 cw(c648.68,275.53) 620.47,370.4 cw(c648.21,277.14) 626.05,371.88 cw(c647.59,279.88) 637.42,373.82 cw(c647.66,278.98) 643.18,374.27 cw(c647.75,277.19) 648.95,374.37 cw(c647.59,273.66) 682.9,367.99 cw(c647.93,274.52) 688.25,365.81 cw(c648.44,275.67) 693.47,363.32 cw(c649.17,277.08) 698.52,360.53 cw(c650.1,278.65) 703.4,357.44 cw(c651.2,280.28) 708.07,354.06 cw(c650.81,279.8) 712.53,350.4 cw(c649.58,278.4) 716.76,346.47 cw(c648.44,277.24) 720.75,342.29 cw(c646.58,275.63) 734.09,323.44 cw(c646.84,275.73) 739.04,312.99 cw(c648.31,276.34) 741.05,307.57 cw(c649.74,276.82) 742.73,302.05 cw(c651.46,277.28) 744.07,296.43 cw(c653.37,277.68) 745.06,290.75 cw(c653.57,277.73) 745.69,285.02 cw(c651.68,277.58) 745.97,279.25 cw(c650,277.54) 745.9,273.47 cw(c648.62,277.6) 745.49,267.71 cw(c647.08,277.78) 742.22,250.68 cw(c647.47,277.64) 738.4,239.76 cw(c648.88,277.07) 736.02,234.5 cw(c650.21,276.42) 733.33,229.39 cw(c651.73,275.55) 730.34,224.45 cw(c653.36,274.49) 727.04,219.72 cw(c653.76,274.22) 723.45,215.2 cw(c652.31,275.45) 719.59,210.91 cw(c651.09,276.62) 715.47,206.87 cw(c650.14,277.64) 711.1,203.08 cw(c649.17,278.86) 696.76,193.34 cw(c649.35,278.5) 686.34,188.32 cw(c649.94,277.08) 680.93,186.29 cw(c650.42,275.67) 675.41,184.59 cw(c650.88,273.97) 669.8,183.24 cw(c651.28,272.05) 664.11,182.24 cw(c651.34,271.83) 658.38,181.61 cw(c651.19,273.72) 652.61,181.34 cw(c651.16,275.39) 646.84,181.43 cw(c651.35,278.05) 618.57,187.05 cw(c651.06,277.27) 613.19,189.17 cw(c650.58,276.17) 607.95,191.61 cw(c649.89,274.79) 602.88,194.37 cw(c648.97,273.23) 597.99,197.44 cw(c647.87,271.6) 593.31,200.81 cw(c648.23,272.03) 588.86,204.48 cw(c649.45,273.42) 584.64,208.43 cw(c650.59,274.56) 580.68,212.63 cw(c652.17,275.92) 570.42,226.6 cw(c652.39,276.09) 565.05,236.84 cw(c651.3,275.59) 562.84,242.18 cw(c650.07,275.13) 560.97,247.65 cw(c648.51,274.65) 559.44,253.22 cw(c645.78,274.02) 557.47,264.58 cw(c646.6,274.08) 557.04,270.34 cw(c648.37,274.16) 556.99,276.11 cw(c649.86,274.13) 557.29,281.88 cw(c651.63,273.95) 560.32,298.95 cw(c651.45,274.03) 564.04,309.9 cw(c650.09,274.58) 566.4,315.17 cw(c648.77,275.22) 569.09,320.29 cw(c647.24,276.08) 572.09,325.22 cw(c645.61,277.15) 575.4,329.94 cw(c645.46,277.24) 579.02,334.43 cw(c646.88,276.01) 582.93,338.69 cw(c648.06,274.86) 587.1,342.68 cw(c648.94,273.88) 591.52,346.41 cw(c649.68,272.95) 601.01,353.02 cw(c649.69,272.96) 611.25,358.4 cw(c649.2,274.04) 616.59,360.61 cw(c648.73,275.27) 622.06,362.47 cw(c648.25,276.84) 627.63,363.98 cw(c647.64,279.54) 639,365.89 cw(c647.73,278.44) 644.76,366.28 cw(c647.79,276.7) 650.54,366.29 cw(c647.62,273.8) 678.84,360.91 cw(c647.88,274.48) 684.22,358.79 cw(c648.36,275.59) 689.45,356.33 cw(c649.07,276.98) 694.51,353.55 cw(c650.53,279.38) 704.01,347.01 cw(c650.36,279.22) 708.42,343.28 cw(c649.15,277.89) 712.57,339.27 cw(c648.06,276.83) 716.45,334.99 cw(c646.59,275.62) 729.06,315.65 cw(c647.26,275.95) 731.42,310.37 cw(c648.32,276.38) 733.44,304.96 cw(c649.76,276.86) 735.1,299.43 cw(c651.5,277.32) 736.38,293.8 cw(c653.42,277.69) 737.29,288.1 cw(c652.66,277.61) 737.8,282.36 cw(c650.83,277.51) 737.93,276.58 cw(c649.29,277.53) 737.68,270.81 cw(c647.32,277.71) 733.01,248.21 cw(c647.98,277.48) 730.95,242.8 cw(c649.03,277.04) 728.55,237.54 cw(c650.38,276.36) 725.81,232.46 cw(c651.94,275.46) 722.74,227.57 cw(c653.55,274.36) 719.35,222.91 cw(c652.9,274.9) 715.64,218.49 cw(c651.55,276.11) 711.64,214.33 cw(c650.48,277.21) 707.37,210.44 cw(c649.28,278.67) 688.01,197.86 cw(c649.63,277.94) 682.72,195.53 cw(c650.07,276.83) 677.29,193.56 cw(c650.55,275.35) 671.74,191.95 cw(c651.2,272.64) 660.39,189.89 cw(c651.2,273.1) 654.64,189.45 cw(c651.12,274.87) 648.86,189.41 cw(c651.28,277.77) 620.59,194.87 cw(c650.96,276.95) 615.24,197.06 cw(c650.43,275.77) 610.04,199.59 cw(c649.66,274.32) 605.04,202.47 cw(c648.22,272.05) 595.69,209.22 cw(c649.14,273.13) 591.4,213.08 cw(c650.31,274.35) 587.37,217.22 cw(c651.3,275.25) 583.63,221.63 cw(c652.23,275.98) 577.06,231.15 cw(c652.11,275.92) 571.81,241.45 cw(c650.87,275.38) 569.71,246.83 cw(c649.51,274.91) 567.98,252.34 cw(c647.81,274.44) 566.63,257.96 cw(c645.89,274.05) 565.69,263.65 cw(c646.3,274.08) 565.15,269.39 cw(c648.13,274.19) 565.02,275.16 cw(c651.27,274.06) 570.19,303.49 cw(c650.62,274.31) 572.34,308.85 cw(c649.47,274.83) 574.85,314.06 cw(c648.03,275.58) 577.72,319.07 cw(c645.76,277.02) 584.47,328.42 cw(c646.84,276.1) 588.33,332.7 cw(c648.04,274.94) 592.49,336.71 cw(c649.53,273.2) 611.59,349.67 cw(c649.33,273.66) 616.85,352.06 cw(c648.9,274.69) 622.26,354.09 cw(c648.42,276.13) 627.8,355.73 cw(c647.76,278.83) 639.14,357.81 cw(c647.76,278.38) 644.9,358.23 cw(c647.83,276.63) 650.67,358.23 cw(c647.78,275.21) 656.44,357.83 cw(c647.64,273.93) 667.83,355.84 cw(c647.66,273.97) 678.84,352.31 cw(c648.15,275.21) 684.13,349.98 cw(c648.78,276.52) 689.25,347.3 cw(c649.66,278.05) 694.15,344.25 cw(c650.75,279.67) 698.81,340.86 cw(c650.22,279.02) 703.22,337.13 cw(c649.01,277.7) 707.34,333.09 cw(c647.95,276.69) 711.17,328.76 cw(c646.89,275.83) 717.88,319.34 cw(c646.86,275.78) 723.23,309.09 cw(c648.03,276.31) 725.35,303.71 cw(c649.38,276.78) 727.09,298.2 cw(c651.08,277.25) 728.42,292.59 cw(c652.99,277.63) 729.33,286.89 cw(c652.24,277.55) 729.81,281.14 cw(c650.45,277.47) 729.86,275.37 cw(c648.98,277.51) 729.5,269.6 cw(c647.65,277.65) 727.57,258.2 cw(c647.64,277.63) 724.05,247.18 cw(c648.88,277.14) 721.72,241.89 cw(c650.19,276.51) 719.02,236.79 cw(c652.56,275.1) 712.53,227.26 cw(c652.43,275.27) 708.76,222.89 cw(c651.14,276.46) 704.67,218.81 cw(c649.49,278.33) 685.7,205.69 cw(c649.65,277.95) 680.44,203.29 cw(c650.08,276.9) 675.02,201.29 cw(c650.56,275.44) 669.47,199.68 cw(c651.19,272.78) 658.11,197.75 cw(c651.12,273.86) 652.34,197.44 cw(c651.09,275.53) 646.57,197.56 cw(c651.26,277.66) 623.98,202.2 cw(c650.96,276.87) 618.61,204.36 cw(c650.44,275.69) 613.43,206.91 cw(c649.64,274.23) 608.45,209.83 cw(c648.61,272.6) 603.72,213.13 cw(c648.51,272.43) 599.25,216.78 cw(c649.73,273.81) 595.08,220.77 cw(c650.82,274.88) 591.21,225.06 cw(c652.05,275.88) 581.62,239.49 cw(c651.68,275.69) 579.16,244.73 cw(c650.71,275.28) 577.09,250.12 cw(c649.3,274.8) 575.43,255.65 cw(c646.64,274.15) 573.41,267 cw(c647.43,274.19) 573.08,272.77 cw(c649.11,274.23) 573.18,278.54 cw(c651.23,274.06) 577.89,301.12 cw(c650.35,274.39) 580.09,306.46 cw(c649.14,274.95) 582.69,311.62 cw(c647.64,275.78) 585.67,316.56 cw(c646.01,276.85) 589.03,321.25 cw(c646.42,276.5) 592.76,325.66 cw(c647.73,275.3) 596.82,329.76 cw(c649.39,273.44) 615.84,342.8 cw(c649.16,273.96) 621.13,345.12 cw(c648.71,275.11) 626.59,347.03 cw(c648.23,276.68) 632.16,348.51 cw(c647.81,278.55) 637.84,349.54 cw(c647.75,278.79) 643.58,350.11 cw(c647.86,276.97) 649.35,350.22 cw(c647.74,274.29) 672.06,346.23 cw(c647.89,274.65) 677.46,344.17 cw(c648.35,275.74) 682.69,341.71 cw(c649.1,277.16) 687.7,338.84 cw(c650.1,278.77) 692.46,335.58 cw(c650.39,279.19) 696.94,331.95 cw(c649.17,277.81) 701.11,327.96 cw(c647.18,275.99) 714.36,309.1 cw(c647.55,276.14) 716.72,303.82 cw(c648.66,276.58) 718.65,298.37 cw(c650.21,277.06) 720.14,292.8 cw(c652.08,277.48) 721.18,287.12 cw(c652.3,277.54) 721.73,281.38 cw(c650.48,277.43) 721.82,275.6 cw(c647.92,277.56) 717.62,252.94 cw(c648.49,277.34) 715.49,247.57 cw(c649.66,276.82) 712.93,242.39 cw(c651.14,276.01) 709.97,237.44 cw(c652.76,274.95) 706.6,232.75 cw(c652.32,275.33) 702.86,228.36 cw(c651.03,276.52) 698.75,224.3 cw(c649.56,278.2) 679.49,211.64 cw(c649.98,277.27) 674.13,209.49 cw(c650.45,275.93) 668.61,207.77 cw(c651.11,273.3) 657.26,205.75 cw(c651.07,274.15) 651.5,205.48 cw(c651.06,275.77) 645.73,205.68 cw(c651.21,277.47) 628.74,209.06 cw(c651.05,277.01) 623.33,211.09 cw(c650.6,275.95) 618.1,213.54 cw(c649.85,274.52) 613.09,216.42 cw(c648.83,272.91) 608.36,219.71 cw(c648.8,272.82) 603.92,223.41 cw(c650,274.15) 599.81,227.46 cw(c651.75,275.7) 587.09,246.67 cw(c650.84,275.3) 584.94,252.04 cw(c649.49,274.82) 583.25,257.56 cw(c646.9,274.19) 581.32,268.92 cw(c648.05,274.25) 581.11,274.69 cw(c650.83,274.16) 585.09,297.38 cw(c650.34,274.36) 587.24,302.75 cw(c649.15,274.9) 589.83,307.91 cw(c646.83,276.24) 596.3,317.45 cw(c647.06,275.98) 600.14,321.76 cw(c648.24,274.83) 604.35,325.71 cw(c649.34,273.53) 618.78,335.28 cw(c649.09,274.05) 624.07,337.62 cw(c648.64,275.2) 629.53,339.51 cw(c648.16,276.81) 635.13,340.91 cw(c647.78,278.69) 640.83,341.8 cw(c647.86,277.79) 646.58,342.17 cw(c647.89,276.1) 652.36,342.03 cw(c647.75,274.34) 669.34,338.66 cw(c647.93,274.85) 674.74,336.59 cw(c648.42,275.97) 679.93,334.06 cw(c649.23,277.45) 684.88,331.08 cw(c650.28,279.04) 689.53,327.67 cw(c649.64,278.27) 693.85,323.85 cw(c648.48,277.07) 697.81,319.64 cw(c647.2,276) 707.32,305.18 cw(c647.81,276.28) 709.62,299.87 cw(c649.02,276.74) 711.44,294.39 cw(c651.59,277.42) 713.54,283.06 cw(c650.95,277.41) 713.79,277.29 cw(c648.19,277.5) 709.69,254.64 cw(c648.89,277.22) 707.43,249.32 cw(c650.17,276.6) 704.72,244.23 cw(c651.75,275.66) 701.54,239.41 cw(c652.55,275.1) 697.93,234.91 cw(c651.21,276.29) 693.9,230.77 cw(c649.74,277.91) 679.8,220.74 cw(c649.8,277.76) 674.57,218.28 cw(c650.22,276.73) 669.14,216.3 cw(c650.7,275.19) 663.56,214.84 cw(c651.1,273.31) 657.87,213.91 cw(c651.05,273.98) 652.11,213.53 cw(c651.09,276.98) 629.42,217.34 cw(c650.86,276.46) 624.08,219.56 cw(c650.26,275.19) 618.98,222.26 cw(c649.33,273.62) 614.16,225.43 cw(c648.8,272.85) 609.67,229.06 cw(c649.99,274.19) 605.55,233.11 cw(c651.53,275.56) 595.69,247.32 cw(c651.19,275.41) 593.32,252.59 cw(c650.05,274.97) 591.46,258.06 cw(c647.5,274.28) 589.36,269.39 cw(c648.23,274.29) 589.16,275.16 cw(c650.58,274.21) 591.86,292.25 cw(c650.52,274.26) 593.82,297.69 cw(c649.49,274.69) 596.28,302.92 cw(c648.04,275.46) 599.23,307.88 cw(c646.49,276.5) 602.66,312.51 cw(c647.34,275.77) 606.54,316.78 cw(c648.45,274.66) 610.83,320.65 cw(c649.23,273.7) 620.44,327.08 cw(c649.1,273.95) 625.65,329.58 cw(c648.69,274.95) 631.08,331.57 cw(c648.21,276.5) 636.67,333 cw(c647.83,278.34) 642.37,333.86 cw(c647.92,277.27) 648.13,334.13 cw(c647.86,274.82) 665.23,331.53 cw(c647.9,274.84) 670.67,329.58 cw(c648.34,275.88) 675.89,327.09 cw(c649.61,278.14) 685.42,320.62 cw(c649.21,277.75) 689.63,316.68 cw(c647.54,276.21) 699.64,302.57 cw(c647.84,276.33) 701.99,297.29 cw(c649.02,276.78) 703.8,291.81 cw(c650.72,277.24) 705.03,286.17 cw(c651.87,277.46) 705.66,280.44 cw(c650.15,277.36) 705.68,274.66 cw(c648.27,277.48) 702.25,257.72 cw(c649.03,277.19) 699.99,252.4 cw(c650.35,276.54) 697.19,247.35 cw(c651.95,275.54) 693.88,242.62 cw(c651.75,275.74) 690.08,238.29 cw(c650.57,276.89) 685.83,234.37 cw(c649.76,277.87) 676.23,227.94 cw(c649.91,277.57) 670.98,225.5 cw(c650.35,276.48) 665.52,223.62 cw(c651.01,274) 654.17,221.67 cw(c650.97,275.14) 648.4,221.63 cw(c651.09,276.98) 631.47,225.15 cw(c650.75,276.11) 626.19,227.48 cw(c650.05,274.73) 621.18,230.36 cw(c649.03,273.16) 616.54,233.77 cw(c649.67,273.91) 612.3,237.69 cw(c651.31,275.43) 602.41,251.87 cw(c650.81,275.22) 600.18,257.2 cw(c649.47,274.74) 598.55,262.74 cw(c647.64,274.31) 597.55,268.42 cw(c647.95,274.31) 597.21,274.18 cw(c650.38,274.27) 599.98,291.23 cw(c650.06,274.41) 602.12,296.6 cw(c648.82,274.99) 604.84,301.69 cw(c647.23,275.95) 608.11,306.44 cw(c647.27,275.87) 611.92,310.78 cw(c648.98,274.11) 625.93,320.87 cw(c648.85,274.46) 631.25,323.14 cw(c648.38,275.77) 636.79,324.79 cw(c647.95,277.6) 642.47,325.78 cw(c647.95,277.22) 648.23,326.09 cw(c647.89,274.92) 665.23,323.06 cw(c648.13,275.5) 670.55,320.8 cw(c648.8,276.85) 675.56,317.94 cw(c649.8,278.39) 680.19,314.5 cw(c649.08,277.56) 684.38,310.52 cw(c647.76,276.35) 691.23,301.23 cw(c647.71,276.29) 693.81,296.06 cw(c648.67,276.7) 695.77,290.62 cw(c650.28,277.17) 697.07,285 cw(c651.46,277.39) 697.66,279.27 cw(c649.8,277.32) 697.55,273.49 cw(c648.45,277.44) 695.28,262.17 cw(c648.91,277.28) 693.17,256.79 cw(c650.15,276.7) 690.43,251.71 cw(c651.73,275.71) 687.08,247.01 cw(c651.31,276.1) 683.17,242.77 cw(c650.02,277.47) 673.93,235.86 cw(c649.95,277.55) 668.75,233.28 cw(c650.36,276.57) 663.3,231.35 cw(c650.83,274.91) 657.67,230.12 cw(c650.98,274.1) 651.92,229.63 cw(c650.99,276.59) 634.9,232.46 cw(c650.76,276.04) 629.61,234.77 cw(c649.59,273.9) 620.13,241.3 cw(c650.23,274.53) 616.11,245.45 cw(c651.25,275.39) 609.78,255.1 cw(c650.67,275.12) 607.57,260.44 cw(c648.38,274.41) 605.33,271.73 cw(c648.96,274.38) 605.36,277.5 cw(c650.35,274.27) 607.66,288.82 cw(c649.79,274.48) 609.87,294.15 cw(c647.69,275.59) 616.3,303.7 cw(c648.82,274.38) 630.14,313.98 cw(c648.66,274.83) 635.52,316.09 cw(c648.17,276.37) 641.12,317.46 cw(c647.94,277.61) 646.86,318.02 cw(c647.98,275.98) 652.63,317.78 cw(c647.88,274.96) 658.32,316.76 cw(c647.88,274.93) 663.82,314.99 cw(c648.24,275.81) 669.03,312.49 cw(c649.08,277.29) 673.83,309.3 cw(c649.22,277.53) 678.12,305.45 cw(c648.18,276.54) 684.9,296.12 cw(c648.63,276.77) 687.26,290.84 cw(c650.73,277.46) 689.58,279.54 cw(c649.42,277.46) 689.46,273.73 cw(c647.82,277.6) 688.52,267.99 cw(c647.78,277.59) 686.8,262.45 cw(c650.6,276.38) 681.2,252.54 675.66,247 668.28,243.15 cw(c666.43,246.69) 667.7,242.9 662.08,241.03 ; 610.78,155.1 ccw(c612.35,158.77) 611.25,154.93 617.84,153.04 ccw(c618.94,156.89) 618.16,152.97 619.78,152.64 cw(c619,148.72) 623,148.72 v1(623,141) ; 649,249 649,238 654.8,238.97 ccw(c654.12,242.91) 655.19,239.06 661.92,240.98 ccw(c660.82,244.82) 662.06,241.02
  Bottom Layer w8: 649,249 v1(649,260)